# Altium PCB Optisk_ut.PcbDoc
Units mm, origin at the board's own origin, x right, y up, seen from the top; angles counter-clockwise.
Board outline 61 x 18 mm, 2 copper layers (Top Layer, Bottom Layer); 12 components, 12 nets, 48 pads, 0 vias.
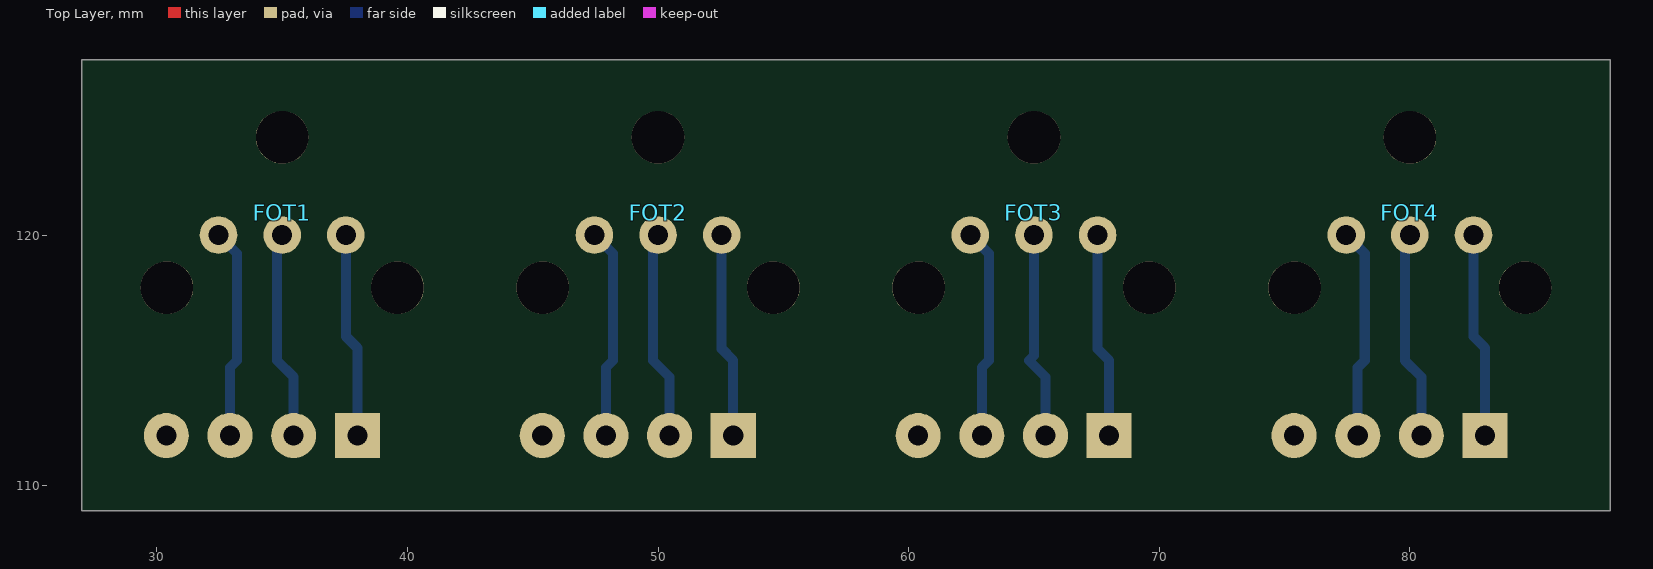
[diagram p0: Top Layer view]
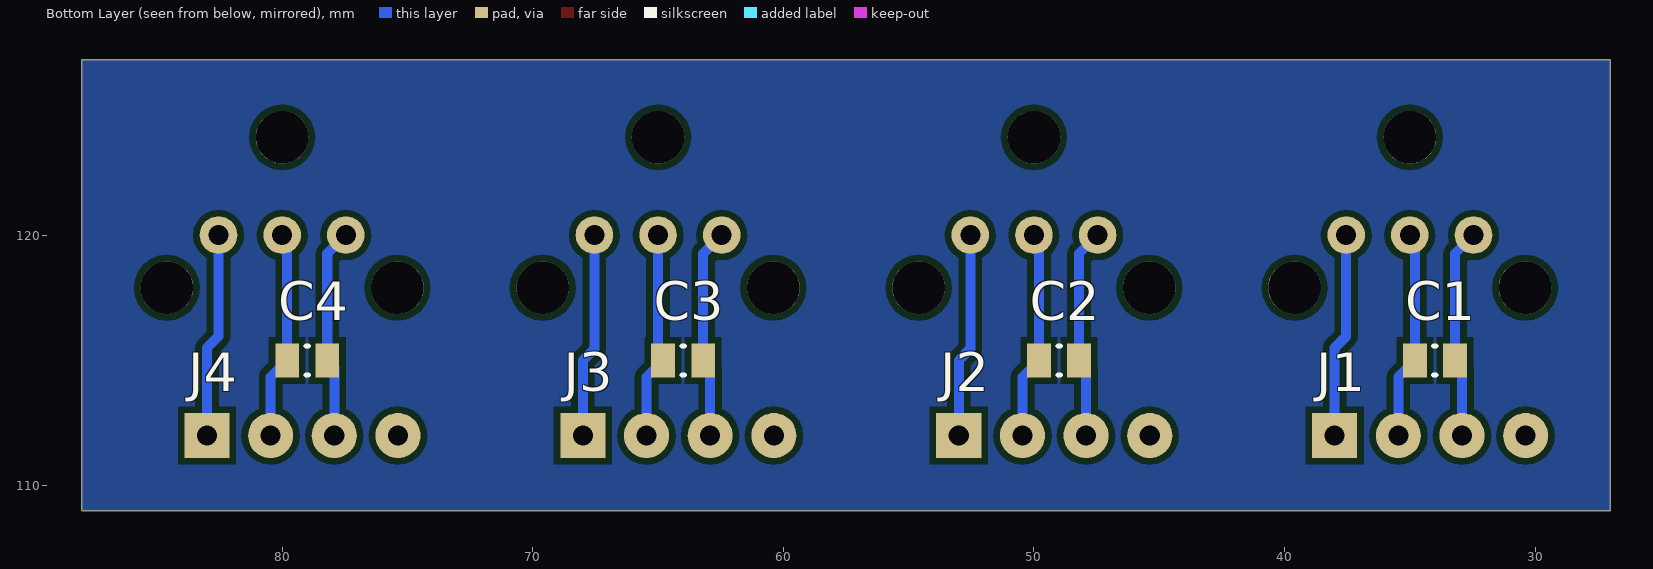
[diagram p1: Bottom Layer view, seen from below]
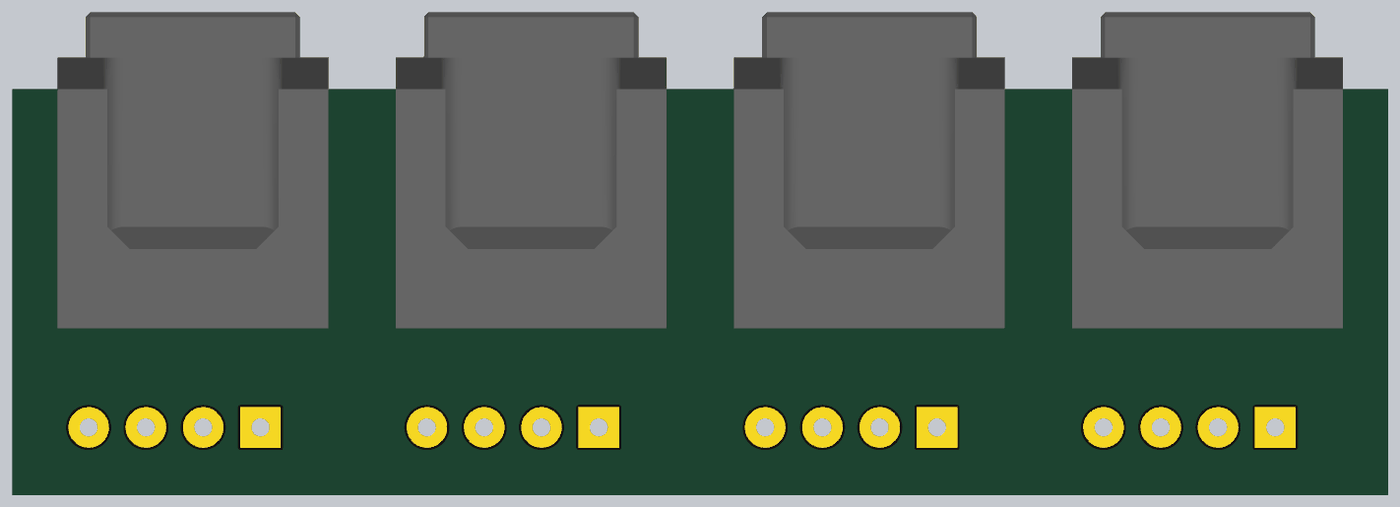
[diagram p2: 3D render of the assembled board from above, using the file's embedded part models]

## Layer stack, top to bottom
Top Layer: signal copper 0.0356
Dielectric: dielectric 0.32, FR-4, Dk 4.8
Bottom Layer: signal copper 0.0356

## Board outline
27,127 88,127 88,109 27,109

## Design rules (kind name [scope] priority, off if disabled: settings)
Clearance [All] p1: gap=0.254
PolygonConnect [All] p1: connectstyle=Relief reliefconductorwidth=0.254 reliefentries=4 polygonreliefangle="90 Angle" airgapwidth=0.254
RoutingVias [All] p1: holewidth=0.711 width=1.27 viastyle="Through Hole" minholewidth=0.711 minwidth=1.27 maxholewidth=0.711 maxwidth=1.27
SolderMaskExpansion [All] p1: expansion=0.102
Width [All] p1: maxlimit=0.8 minlimit=0.4 preferedwidth=0.4
28 further rules are at their usual default settings.

## Components (designator, comment, footprint, x,y, rotation, side; value= is the part's Value field where it differs from the comment)
C1 "100nF" CAPC0805(2012)100_L 34,115 r180 bottom
C2 "100nF" CAPC0805(2012)100_L 49,115 r180 bottom
C3 "100nF" CAPC0805(2012)100_L 64,115 r180 bottom
C4 "100nF" CAPC0805(2012)100_L 79,115 r180 bottom
FOT1 "GP1FAV50TK" GP1FAV50TK 35,120 r90 top
FOT2 "GP1FAV50TK" GP1FAV50TK 50,120 r90 top
FOT3 "GP1FAV50TK" GP1FAV50TK 65,120 r90 top
FOT4 "GP1FAV50TK" GP1FAV50TK 80,120 r90 top
J1 "Fra PCB" "JST 4pin" 38,112 r270 bottom
J2 "Fra PCB" "JST 4pin" 53,112 r270 bottom
J3 "Fra PCB" "JST 4pin" 68,112 r270 bottom
J4 "Fra PCB" "JST 4pin" 83,112 r270 bottom

## Footprints (in the part's own frame and the unit in brackets; to place one, negate y for a bottom-side part, rotate by r counter-clockwise, add the part's x,y. Pads: shape width x height; smd on the part's side, far side on the other; paste and mask are expansions set on the pad)
CAPC0805(2012)100_L [mm] "Chip Capacitor, Body 2.0x1.2mm, Height 1.0mm, IPC High Density"
  rect 0.95x1.35 smd: 1(-0.8,0) 2(0.8,0)
  silkscreen extent -0.05,-0.58 0.05,0.58, body extent -1.1,-0.72 1.1,0.72, height 1
GP1FAV50TK [mm] "TOSLINK Transmitter 660nm"
  round 1.5 hole 0.8: 1(0,-2.54) 2(0,0) 3(0,2.54)
  round 2.1 hole 2.1: 4(-2.1,4.6) 4(-2.1,-4.6) 4(3.9,0)
  body extent -3.6,-6 10.4,6, height 19.02
"JST 4pin" [mm]
  rect 1.8x1.8 hole 0.8: 1(0,0)
  round 1.8 hole 0.8: 2(0,2.54) 3(0,5.08) 4(0,7.62)

## Part data
C1 C2 C3 C4: library part CMP-1036-04418-1, "CAP 100nF 50V ±5% 0805 (2012 Metric) Thickness 1mm SMD"
J1 J2 J3 J4: library part "JST 4pin"

## Nets (pads, with @x,y where several pads share a name; then routed paths per layer and width w, separated by ;. In a path a pad name is that pad's centre, name@x,y a point inside that pad or via, vN(x,y) a via of type N, cw(c..) or ccw(c..) an arc to the next point about the centre after c; other vN are vias at no path point)
NetC1_1: C1.1 FOT1.2 J1.2 | length 8.4
  Bottom Layer w0.4: FOT1.2 34.8,119.8 C1.1 35.46,114.34 J1.2
NetC1_2: C1.2 FOT1.3 J1.3 | length 8.4
  Bottom Layer w0.4: FOT1.3 33.2,119.26 C1.2 32.92,114.72 J1.3
NetC2_1: C2.1 FOT2.2 J2.2 | length 8.4
  Bottom Layer w0.4: FOT2.2 49.8,119.8 C2.1 50.46,114.34 J2.2
NetC2_2: C2.2 FOT2.3 J2.3 | length 8.4
  Bottom Layer w0.4: FOT2.3 48.2,119.26 C2.2 47.92,114.72 J2.3
NetC3_1: C3.1 FOT3.2 J3.2 | length 8.4
  Bottom Layer w0.4: FOT3.2 65,115.2 C3.1 65.46,114.34 J3.2
NetC3_2: C3.2 FOT3.3 J3.3 | length 8.4
  Bottom Layer w0.4: FOT3.3 63.2,119.26 C3.2 62.92,114.72 J3.3
NetC4_1: C4.1 FOT4.2 J4.2 | length 8.4
  Bottom Layer w0.4: FOT4.2 79.8,119.8 C4.1 80.46,114.34 J4.2
NetC4_2: C4.2 FOT4.3 J4.3 | length 8.4
  Bottom Layer w0.4: FOT4.3 78.2,119.26 C4.2 77.92,114.72 J4.3
NetFOT1_1: FOT1.1 J1.1 | length 8.2
  Bottom Layer w0.4: FOT1.1 37.54,115.96 38,115.5 J1.1
NetFOT2_1: FOT2.1 J2.1 | length 8.2
  Bottom Layer w0.4: FOT2.1 52.54,115.46 53,115 J2.1
NetFOT3_1: FOT3.1 J3.1 | length 8.2
  Bottom Layer w0.4: FOT3.1 67.54,115.46 68,115 J3.1
NetFOT4_1: FOT4.1 J4.1 | length 8.2
  Bottom Layer w0.4: FOT4.1 82.54,115.96 83,115.5 J4.1
pads on no net: FOT1.4 FOT2.4 FOT3.4 FOT4.4 J1.4 J2.4 J3.4 J4.4

## Polygon pours and split planes (outlines as drawn)
no net on Bottom Layer "Bottom Layer-No Net" (solid, pour order 2): 27,127 88,127 88,109 27,109 27,127